# Altium PCB erb-pcb0002.PcbDoc
Units mm, origin at the board's own origin, x right, y up, seen from the top; angles counter-clockwise.
Board outline 92 x 67 mm, 4 copper layers (Top Layer, Mid-Layer 1, Mid-Layer 2, Bottom Layer); 93 components, 78 nets, 623 pads, 0 vias.
Unrouted connection lines stored in the file: 144.
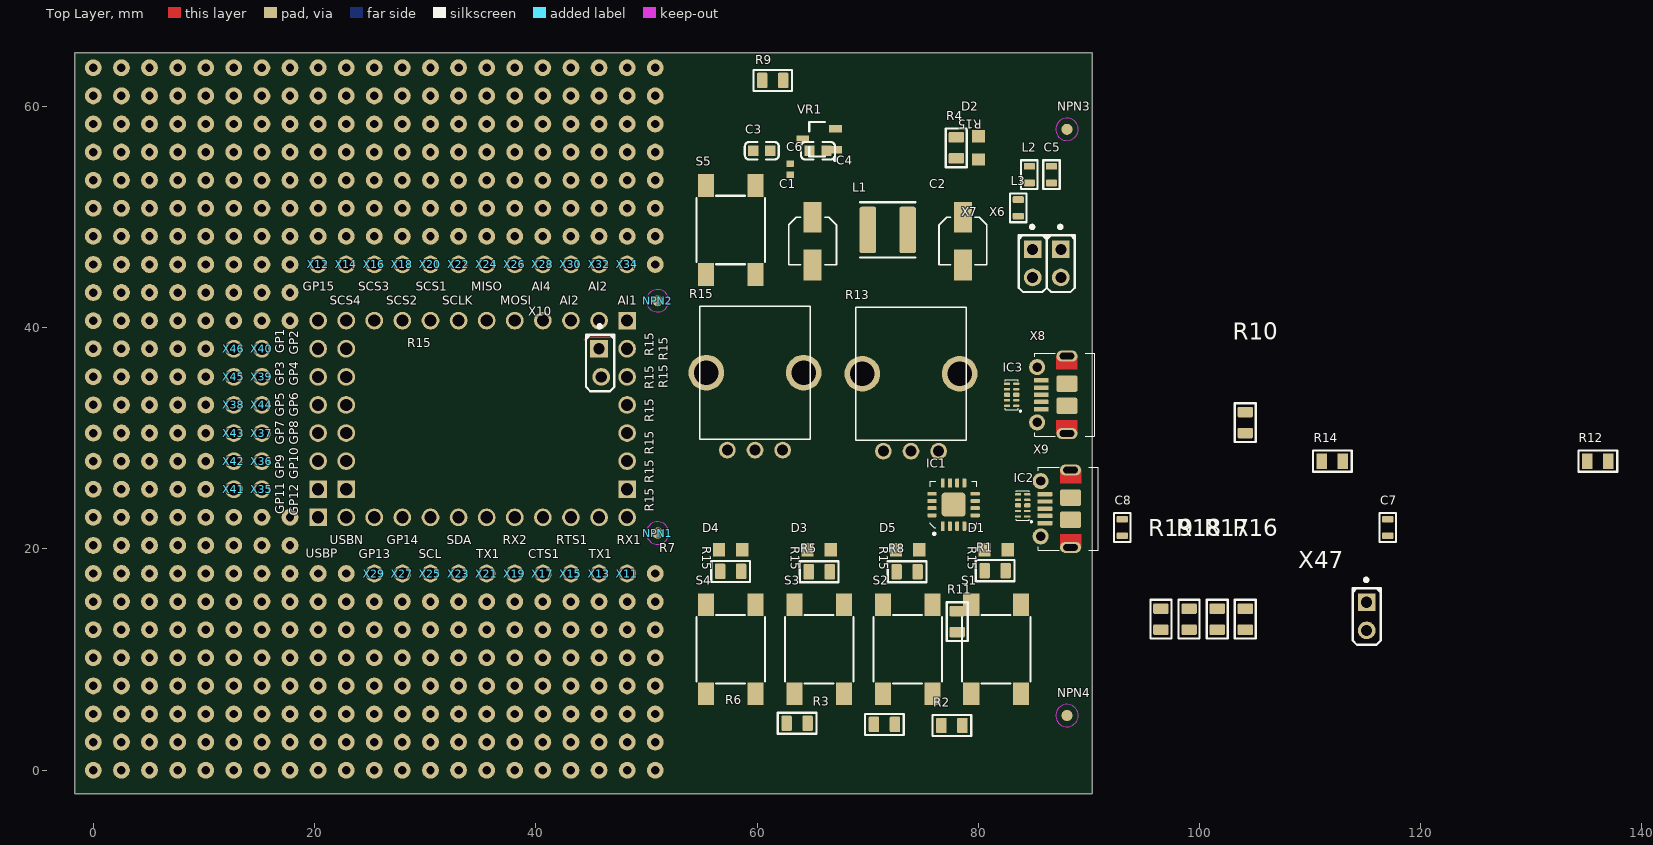
[diagram p0: Top Layer view]
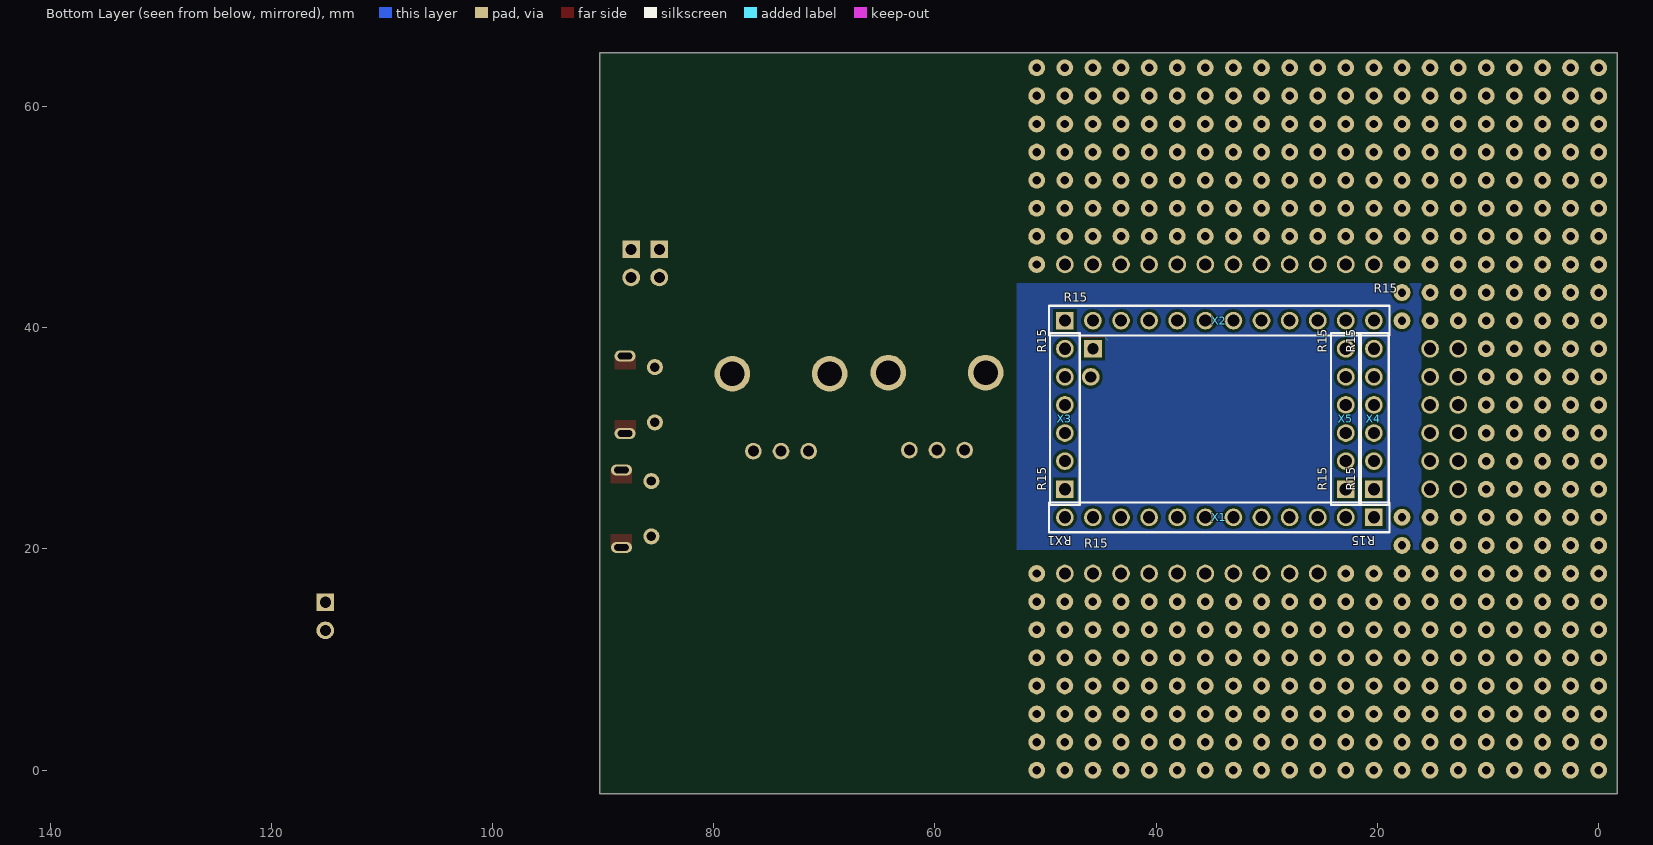
[diagram p1: Bottom Layer view, seen from below]
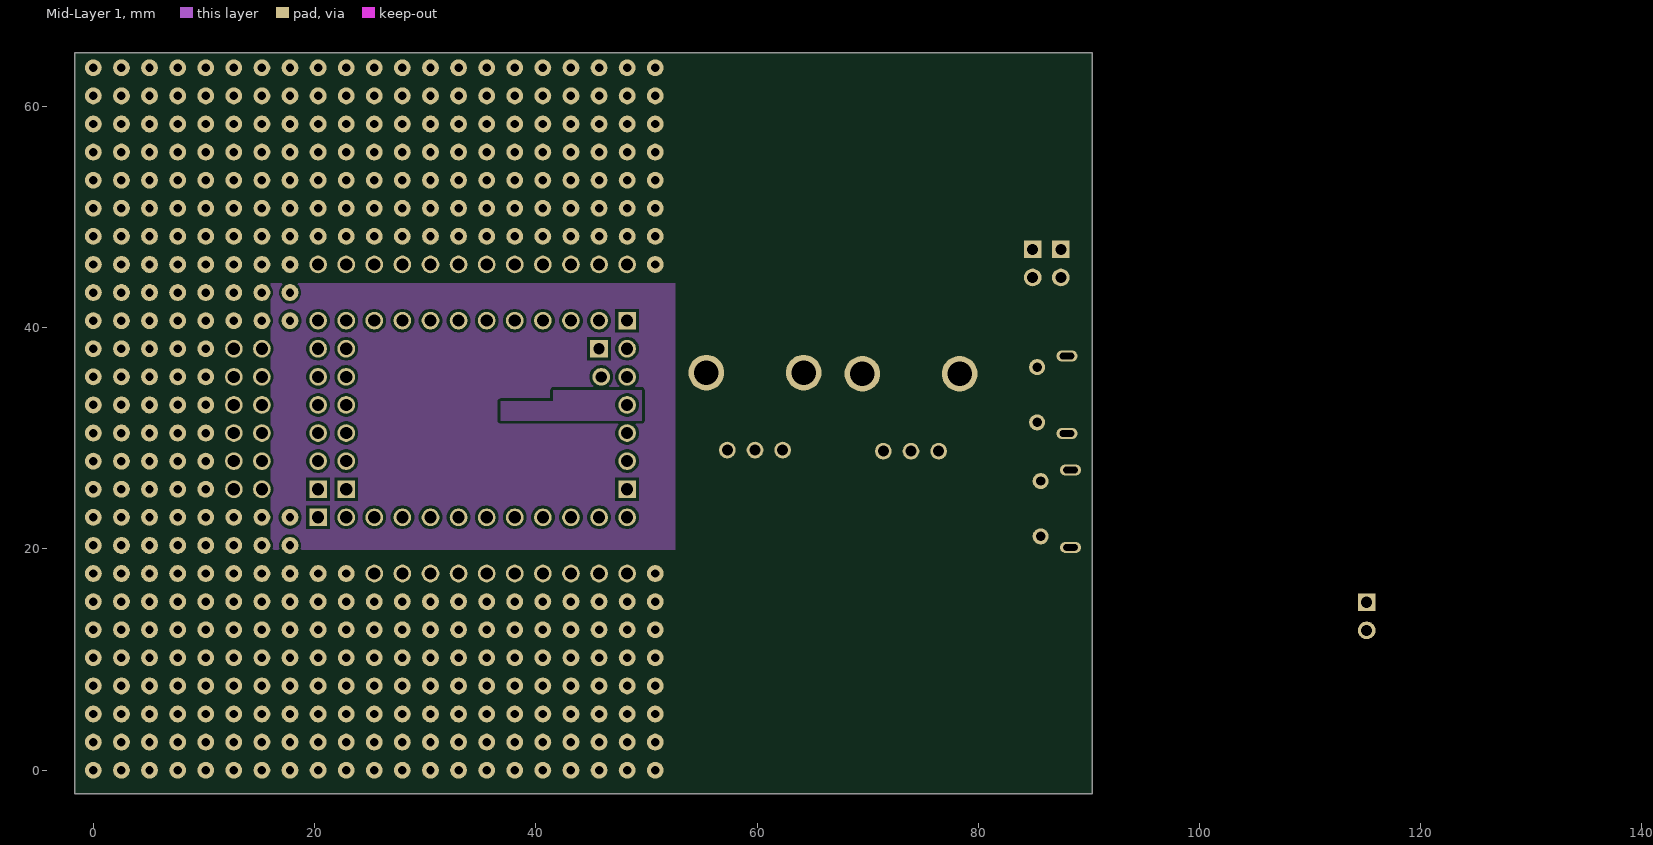
[diagram p2: Mid-Layer 1]
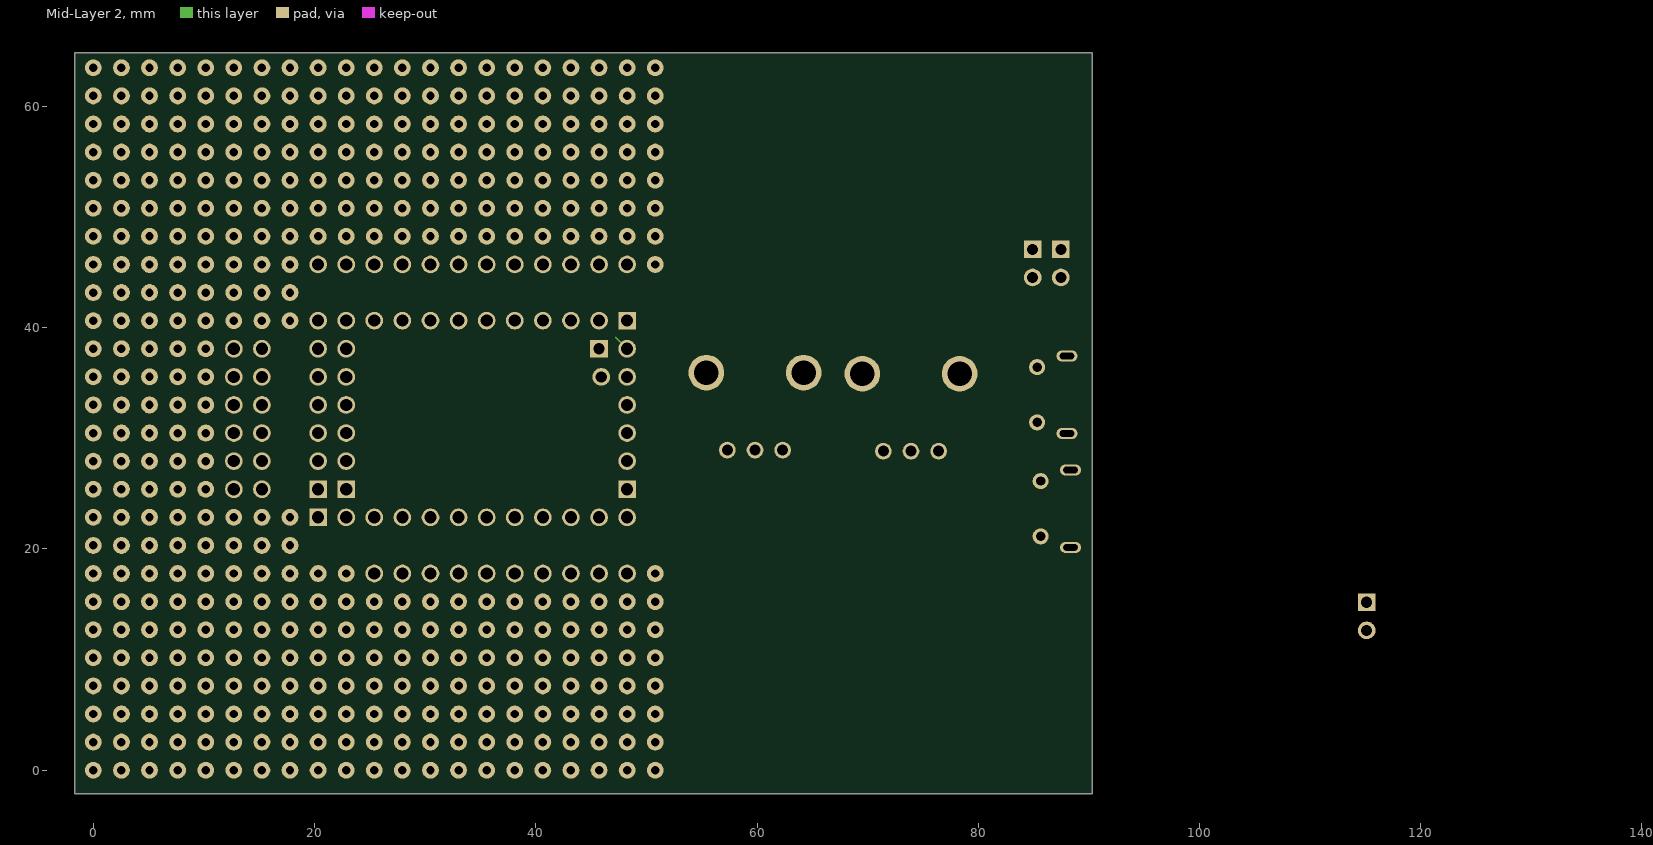
[diagram p3: Mid-Layer 2]

## Layer stack, top to bottom
Top Solder: solder mask 0.0102, Solder Resist, Dk 3.5
Top Layer: signal copper 0.0356
Dielectric 1: dielectric 0.32, FR-4, Dk 4.8
Mid-Layer 1: signal copper 0.0356
Dielectric3: dielectric 0.32, FR-4, Dk 4.8
Mid-Layer 2: signal copper 0.0356
Dielectric2: dielectric 0.32, FR-4, Dk 4.8
Bottom Layer: signal copper 0.0356
Bottom Solder: solder mask 0.0102, Solder Resist, Dk 3.5

## Board outline
-1.68,64.86 90.32,64.86 90.32,-2.14 -1.68,-2.14

## Design rules (kind name [scope] priority, off if disabled: settings)
Clearance [All] p1: gap=0.254 ignorepadtopadclearanceinfootprint=FALSE except(0: Arc-Hole Track-Hole SMDPad-Hole THPad-Hole Via-Hole Fill-Hole Poly-Hole Region-Hole Text-Hole)
DiffPairsRouting [All] p1: maxlimit=0.254 minlimit=0.254 mostfreqgap=0.254 toplayer_minwidth=0.381 toplayer_maxwidth=0.381 toplayer_prefwidth=0.381 midlayer1_minwidth=0.381 midlayer1_maxwidth=0.381 midlayer1_prefwidth=0.381 midlayer2_minwidth=0.381 midlayer2_maxwidth=0.381 midlayer2_prefwidth=0.381 bottomlayer_minwidth=0.381 bottomlayer_maxwidth=0.381 bottomlayer_prefwidth=0.381 maxuncoupledlength=12.7
PolygonConnect [All] p1: connectstyle=Relief reliefconductorwidth=0.254 reliefentries=4 polygonreliefangle="90 Angle" airgapwidth=0.254
RoutingVias [All] p1: holewidth=0.711 width=1.27 viastyle="Through Hole" minholewidth=0.711 minwidth=1.27 maxholewidth=0.711 maxwidth=1.27
SolderMaskExpansion [All] p1: expansion=0.102 istentingtop=FALSE
Width [All] p1: maxlimit=0.254 minlimit=0.254 preferedwidth=0.254
29 further rules are at their usual default settings.

## Classes and differential pairs
differential pair DBG_USB: +DBG_USB_P -DBG_USB_N

## Components (designator, comment, footprint, x,y, rotation, side; value= is the part's Value field where it differs from the comment)
C1 "22u" CAPAE4643X54M 65.02,47.84 r270 top
C2 "22u" CAPAE4643X54M 78.62,47.84 r270 top
C3 "1uF" 0603_C 60.43,56 r0 top
C4 "1uF" 0603_C 65.51,56 r0 top
C5 "100n" CAPC1608X95N 86.62,53.84 r90 top value=100nF
C6 "100nF" CAPC1005X55 63,54.34 r90 top
C7 "100n" CAPC1608X95N 117.02,21.94 r90 top value=100nF
C8 "100n" CAPC1608X95N 93.02,21.94 r90 top value=100nF
D1 "RED" WL-SMCW_0805 81.62,19.94 r180 top
D2 "RED" WL-SMCW_0805 80.02,56.265 r90 top
D3 "RED" WL-SMCW_0805 65.62,19.94 r180 top
D4 "RED" WL-SMCW_0805 57.62,19.932 r180 top
D5 "RED" WL-SMCW_0805 73.62,19.94 r180 top
IC1 "FT230X" QFN65P400X400X80-17N 77.77,24.015 r90 top
IC2 "TPD4EUSB30" "DQA R-PUSON-N10" 84.02,23.94 r90 top
IC3 "TPD4EUSB30" "DQA R-PUSON-N10" 83.02,33.94 r90 top
L1 "10uH" INDP5050X39N 71.82,48.84 r0 top
L2 "120R" INDC1608X95AN 84.62,53.84 r90 top
L3 "120R" INDC1608X95AN 83.62,50.84 r90 top
NPN1 "FID" Fiducial_1mm 51.02,21.44 r90 top
NPN2 "FID" Fiducial_1mm 51.02,42.44 r90 top
NPN3 "FID" Fiducial_1mm 88.02,57.94 r90 top
NPN4 "FID" Fiducial_1mm 88.02,4.94 r90 top
R1 "130R" RESC2012X70N#1 81.52,18.04 r180 top
R2 "100k" RESC2012X70N#1 77.62,4.04 r180 top
R3 "100k" RESC2012X70N#1 71.52,4.14 r0 top
R4 "130R" RESC2012X70N#1 78.02,56.265 r90 top
R5 "130R" RESC2012X70N#1 65.62,17.94 r180 top
R6 "100k" RESC2012X70N#1 63.62,4.24 r0 top
R7 "130R" RESC2012X70N#1 57.62,17.972 r0 top
R8 "130R" RESC2012X70N#1 73.57,17.94 r180 top
R9 "100k" RESC2012X70N#1 61.42,62.36 r0 top
R10 "100k" RESC2012X70N#1 104.14,31.43 r90 top
R11 "100k" RESC2012X70N#1 78.1,13.44 r90 top
R12 "100k" RESC2012X70N#2 136.02,27.94 r0 top
R13 "POT_50k_lin_9mm" PTV09 73.92,35.84 r0 top
R14 "100k" RESC2012X70N#2 112.02,27.94 r0 top
R15 "POT_50k_lin_9mm" PTV09 59.82,35.94 r0 top
R16 "0R" RESC2012X70N#1 104.14,13.65 r90 top
R17 "0R" RESC2012X70N#1 101.6,13.65 r90 top
R18 "0R" RESC2012X70N#1 99.06,13.65 r90 top
R19 "0R" RESC2012X70N#1 96.52,13.65 r90 top
S1 "UK-B0228-G5-160-JZ" UK-B0228-G5-160-JZ 81.62,10.94 r270 top
S2 "UK-B0228-G5-160-JZ" UK-B0228-G5-160-JZ 73.62,10.94 r90 top
S3 "UK-B0228-G5-160-JZ" UK-B0228-G5-160-JZ 65.62,10.94 r90 top
S4 "UK-B0228-G5-160-JZ" UK-B0228-G5-160-JZ 57.62,10.94 r90 top
S5 "UK-B0228-G5-160-JZ" UK-B0228-G5-160-JZ 57.62,48.84 r90 top
VR1 "XC6206P332MR" SOT-23-3L 65.62,57.04 r0 top
X1 "HDR 1x12" 61301211121 34.29,22.86 r0 bottom
X2 "HDR 1x12" 61301211121 34.29,40.64 r180 bottom
X3 "HDR 1x6" 61300611121 48.26,31.75 r90 bottom
X4 "HDR 1x6" 61300611121 20.32,31.75 r90 bottom
X5 "HDR 1x6" 61300611121 22.86,31.75 r90 bottom
X6 "HDR 1x2" CON_HEADER2.54_1x2W#1 87.464,44.546 r0 top
X7 "HDR 1x2" CON_HEADER2.54_1x2W#1 84.924,44.546 r0 top
X8 "USB Micro B_JLC" Molex_1050170001 88.02,33.94 r180 top
X9 "USB Micro B_JLC" Molex_1050170001 88.345,23.64 r180 top
X10 "HDR 1x2" CON_HEADER2.54_1x2W#2 45.82,35.56 r0 top
X11 "PAD" PAD_1.1_1.6 48.26,17.78 r0 top net-tie
X12 "PAD" PAD_1.1_1.6 20.32,45.72 r0 top net-tie
X13 "PAD" PAD_1.1_1.6 45.72,17.78 r0 top net-tie
X14 "PAD" PAD_1.1_1.6 22.86,45.72 r0 top net-tie
X15 "PAD" PAD_1.1_1.6 43.18,17.78 r0 top net-tie
X16 "PAD" PAD_1.1_1.6 25.4,45.72 r0 top net-tie
X17 "PAD" PAD_1.1_1.6 40.64,17.78 r0 top net-tie
X18 "PAD" PAD_1.1_1.6 27.94,45.72 r0 top net-tie
X19 "PAD" PAD_1.1_1.6 38.1,17.78 r0 top net-tie
X20 "PAD" PAD_1.1_1.6 30.48,45.72 r90 top net-tie
X21 "PAD" PAD_1.1_1.6 35.56,17.78 r0 top net-tie
X22 "PAD" PAD_1.1_1.6 33.02,45.72 r90 top net-tie
X23 "PAD" PAD_1.1_1.6 33.02,17.78 r90 top net-tie
X24 "PAD" PAD_1.1_1.6 35.56,45.72 r90 top net-tie
X25 "PAD" PAD_1.1_1.6 30.48,17.78 r90 top net-tie
X26 "PAD" PAD_1.1_1.6 38.1,45.72 r90 top net-tie
X27 "PAD" PAD_1.1_1.6 27.94,17.78 r90 top net-tie
X28 "PAD" PAD_1.1_1.6 40.64,45.72 r90 top net-tie
X29 "PAD" PAD_1.1_1.6 25.4,17.78 r90 top net-tie
X30 "PAD" PAD_1.1_1.6 43.18,45.72 r90 top net-tie
X32 "PAD" PAD_1.1_1.6 45.72,45.72 r90 top net-tie
X34 "PAD" PAD_1.1_1.6 48.26,45.72 r90 top net-tie
X35 "PAD" PAD_1.1_1.6 15.24,25.4 r90 top net-tie
X36 "PAD" PAD_1.1_1.6 15.24,27.94 r90 top net-tie
X37 "PAD" PAD_1.1_1.6 15.24,30.48 r90 top net-tie
X38 "PAD" PAD_1.1_1.6 12.7,33.02 r90 top net-tie
X39 "PAD" PAD_1.1_1.6 15.24,35.56 r90 top net-tie
X40 "PAD" PAD_1.1_1.6 15.24,38.1 r90 top net-tie
X41 "PAD" PAD_1.1_1.6 12.7,25.4 r0 top net-tie
X42 "PAD" PAD_1.1_1.6 12.7,27.94 r90 top net-tie
X43 "PAD" PAD_1.1_1.6 12.7,30.48 r90 top net-tie
X44 "PAD" PAD_1.1_1.6 15.24,33.02 r90 top net-tie
X45 "PAD" PAD_1.1_1.6 12.7,35.56 r90 top net-tie
X46 "PAD" PAD_1.1_1.6 12.7,38.1 r90 top net-tie
X47 "HDR 1x2" CON_HEADER2.54_1x2W#1 115.12,12.64 r0 top

## Footprints (in the part's own frame and the unit in brackets; to place one, negate y for a bottom-side part, rotate by r counter-clockwise, add the part's x,y. Pads: shape width x height; smd on the part's side, far side on the other; paste and mask are expansions set on the pad)
0603_C [mm]
  rect 0.93x0.98 smd: 1(-0.77,0) 2(0.77,0)
  silkscreen extent -1.53,-0.79 1.54,0.79, body extent -0.8,-0.4 0.8,0.4, height 0.3
61300611121 [mm] "Pin Header, pitch 2.54 mm, THT, Vertical, single row, 6p"
  rect 1.6x1.6 hole 1.1: 1(-6.35,0)
  round 1.6 hole 1.1: 2(-3.81,0) 3(-1.27,0) 4(1.27,0) 5(3.81,0) 6(6.35,0)
  silkscreen extent -7.77,-1.35 7.77,1.35, body extent -7.62,-1.27 7.62,1.27, height 8.57
61301211121 [mm] "Pin Header, pitch 2.54 mm, THT, Vertical, single row, 12p"
  rect 1.6x1.6 hole 1.1: 1(-13.97,0)
  round 1.6 hole 1.1: 2(-11.43,0) 3(-8.89,0) 4(-6.35,0) 5(-3.81,0) 6(-1.27,0) 7(1.27,0) 8(3.81,0) 9(6.35,0) 10(8.89,0) 11(11.43,0) 12(13.97,0)
  silkscreen extent -15.39,-1.35 15.39,1.35, body extent -15.24,-1.27 15.24,1.27, height 8.57
CAPAE4643X54M [mm] "Aluminum Electrolytic Capacitor, Body 4,30x4,30x5,40mm, IPC Low Density"
  rect 2.8x1.6 smd: 1(-2.15,0) 2(2.15,0)
  silkscreen extent -2.15,-2.15 2.15,2.15, body extent -2.3,-2.15 2.3,2.15, height 5.4
CAPC1005X55 [mm] "Chip Capacitor, 2-Leads, Body 1,0x0,5mm, imperial 0402"
  rrect25% 0.6x0.7 smd: 1(-0.5,0) 2(0.5,0)
  body extent -0.5,-0.3 0.5,0.3, height 0.55
CAPC1608X95N [mm] "Chip Capacitor, 2-Leads, Body 1,6x0,8mm, imperial 0603"
  rrect25% 0.6x1 smd: 1(-0.75,0) 2(0.75,0)
  silkscreen extent -1.3,-0.75 1.3,0.75, body extent -0.8,-0.4 0.8,0.4, height 0.3
CON_HEADER2.54_1x2W#1 [mm]
  rect 1.6x1.6 hole 1: 1(0,2.54)
  round 1.6 hole 1: 2(0,0)
  silkscreen extent -1.27,-1.31 1.27,4.71, body extent -1.27,-1.27 1.27,3.81, height 9.51
CON_HEADER2.54_1x2W#2 [mm]
  rect 1.6x1.6 hole 1: 1(-0.1,2.54)
  round 1.6 hole 1: 2(0.1,0)
  silkscreen extent -1.27,-1.31 1.27,4.71, body extent -1.27,-1.27 1.27,3.81, height 9.51
"DQA R-PUSON-N10" [mm]
  rrect50% 0.2x0.56 smd mask+0.05: 1(-1,-0.415) 2(-0.5,-0.415) 4(0.5,-0.415) 5(1,-0.415) 6(1,0.415) 7(0.5,0.415) 9(-0.5,0.415) 10(-1,0.415)
  rrect50% 0.4x0.56 smd mask+0.05: 3(0,-0.415) 8(0,0.415)
  silkscreen extent -1.5,-0.81 1.34,0.59, body extent -1.25,-0.5 1.25,0.5, height 0.55
Fiducial_1mm [mm]
  round 1 smd mask+0.5: 0(0,0)
  Top Layer keep-out circle w0.01: c0,0 r1.016
INDC1608X95AN [mm] "Chip Inductor, 2-Leads, Body 1,6x0,8mm, imperial 0603"
  rrect25% 0.6x1 smd: 1(-0.75,0) 2(0.75,0)
  silkscreen extent -1.3,-0.75 1.3,0.75, body extent -0.8,-0.47 0.8,0.48, height 0.8
INDP5050X39N [mm] "Precision Wire Wound Inductor, 2-Leads, Body 4,95x4,95mm, IPC Medium Density"
  rrect25% 1.5x4.2 smd: 1(-1.8,0) " "(1.8,0)
  silkscreen extent -2.5,-2.5 2.5,2.5, body extent -2.47,-2.47 2.48,2.48, height 3.9
Molex_1050170001 [mm] "USB 2.0 FEMALE R/A A TYPE"
  rrect25% 1.35x0.4 smd mask+0.05: 1(2.325,1.3) 2(2.325,0.65) 3(2.325,0) 4(2.325,-0.65) 5(2.325,-1.3)
  oval 1.9x1 hole 0.6 slot 1.3 at 0 deg: SH(0,3.5) SH(0,-3.5)
  rrect25% 1.9x1.5 smd: SH(0,1) SH(0,-1)
  round 1.45 hole 0.85: SH(2.7,2.5) SH(2.7,-2.5)
  Top Layer region: -0.95,3.5 -0.95,2.3 0.95,2.3 0.95,3.5
  Top Layer region: 0.95,-3.5 0.95,-2.3 -0.95,-2.3 -0.95,-3.5
  silkscreen extent -2.5,-3.75 2.9,3.75, body extent -2.5,-4.1 2.9,4.1, height 2.68
PAD_1.1_1.6 [mm]
  round 1.6 hole 1.1: 1(0,0)
PTV09 [mm]
  round 1.508 hole 1: 1(-2.5,-7) 2(0,-7) 3(2.5,-7)
  round 3.216 hole 2.2: NC1(-4.4,0) NC2(4.4,0)
  silkscreen extent -5,-6 5,6, body extent -5.89,-6.8 5.5,5.8, height 25.5
QFN65P400X400X80-17N [mm] "FT230X USB TO BASIC UART IC"
  rect 0.85x0.35 smd: 1(-1.95,0.975)
  rrect50% 0.85x0.35 smd: 2(-1.95,0.325) 3(-1.95,-0.325) 4(-1.95,-0.975) 9(1.95,-0.975) 10(1.95,-0.325) 11(1.95,0.325) 12(1.95,0.975)
  rrect50% 0.35x0.85 smd: 5(-0.975,-1.95) 6(-0.325,-1.95) 7(0.325,-1.95) 8(0.975,-1.95) 13(0.975,1.95) 14(0.325,1.95) 15(-0.325,1.95) 16(-0.975,1.95)
  rrect25% 2.15x2.15 smd: 17(0,0)
  silkscreen extent -2.75,-2.1 2.1,2.1, body extent -2.05,-2.05 2.05,2.05, height 0.8
RESC2012X70N#1 [mm] "Chip Resistor, 2-Leads, Body 2,0x1,25mm, imperial 0805"
  rrect25% 0.95x1.4 smd: 1(-0.95,0) 2(0.95,0)
  silkscreen extent -1.75,-0.95 1.75,0.95, body extent -1,-0.6 1,0.6, height 0.7
RESC2012X70N#2 [mm] "Chip Resistor, 2-Leads, Body 2,0x1,25mm, imperial 0805"
  rect 0.95x1.4 smd: 1(-0.95,0) 2(0.95,0)
  silkscreen extent -1.75,-0.95 1.75,0.95, body extent -1,-0.6 1,0.6, height 0.7
SOT-23-3L [mm] "http://www.aosmd.com/res/packaging_information/SOT-23-3L.pdf"
  rect 1.15x0.65 smd: 1(1.475,-0.95) 2(1.475,0.95) 3(-1.475,0)
  silkscreen extent -0.9,-1.95 1.6,1.55, body extent -0.9,-1.55 0.9,1.55, height 1.25
UK-B0228-G5-160-JZ [mm] "SMD Tact Switch, body 6x6mm"
  rect 2.05x1.45 smd: 1(-4.025,2.25) 2(4.025,2.25) 3(-4.025,-2.25) 4(4.025,-2.25)
  silkscreen extent -3.1,-3.1 3.1,3.1, body extent -4.5,-3.1 4.5,3.1, height 7
WL-SMCW_0805 [mm] "SMD Mono-color Chip LED, body 2.0x1.25mm"
  rect 1.1x1.2 smd: A(1.05,0) K(-1.05,0)
  body extent -1,-0.63 1,0.62, height 0.7

## Part data
C1 C2: library part CAP_22u, "Aluminium Electrolytic Capacitors - SMD 22UF 16V HA SMD", Manufacturer=Panasonic, Manufacturer Part Number=EEE-HAC220WAR, Tolerance=20%, Voltage Rating=16V, Alternatives allowed=NO
C3 C4: library part "0603 1uF (105) 10% 50V", "Chip capacitors", Manufacturer="Samsung Electro-Mechanics", Package=0603, PartNumber=CL10A105KB8NNNC, SuppliersPartNumber=C15849, Tolerance=10%, Voltage=50V, Capacitance=1uF, ComponentLink1Description="Supplier link", ComponentLink1URL=http://www.szlcsc.com/product/details_16531.html, Supplier=LC
C5 C7 C8: library part 100n_50V, "100n_50V", Manufacturer=AVX, Manufacturer Part Number=06031C104KAT2A, Tolerance=+-10%, Voltage Rating=100V, Alternatives allowed=YES, Notes="X7R, 0603"
C6: library part CAP_100nF_0402, "X7R 100nF ±10% 16V 0402 Multilayer Ceramic Capacitors MLCC - SMD/SMT ROHS", JLC=C1525, Manufacturer="Samsung Electro-Mechanics", Manufacturer Part Number=CL05B104KO5NNNC, Tolerance=10%, Voltage Rating=16VDC, Alternatives allowed=yes
D1 D2 D3 D4 D5: library part LED_0805_RED_AK, "Standard LEDs - SMD WL-SMCW SMDMono TpVw Waterclr 0805 Red", JLC=C84256, Manufacturer="Wurth Elektronik", Manufacturer Part Number=150080RS75000, Voltage Rating=2.0, Alternatives allowed=YES
IC1: library part IC_FT230X, "USB TO BASIC UART IC", Manufacturer=FTDI, Manufacturer Part Number=FT230XQ-R, Supplier Part Number 1=895-FT230XQ-R, Alternatives allowed=NO, Supplier 1=Mouser
IC2 IC3: library part TPD4EUSB30DQAR, "2-, 4-Channel ESD Protection for Super-Speed USB 3.0 Interface", Manufacturer="Texas Instruments", Alternatives allowed=NO, Manufacturer Part Number=TPD4EUSB30DQAR
L1: library part IND_10uH_2.2A, "Fixed Inductors 10uH 2.2A", JLC=N/A, Manufacturer=Bourns, Manufacturer Part Number=SRN5040TA-100M, Tolerance=10%, Voltage Rating=50V, Alternatives allowed=yes
L2 L3: library part FB_120R_0603, "Chip Bead Inductors for Power Lines", Manufacturer="Taiyo Yuden", Manufacturer Part Number=FBMH1608HL121-T, Alternatives allowed=YES, Notes="0603, 1,2A"
NPN1 NPN2 NPN3 NPN4: library part Fiducial_1mm
R1 R4 R5 R7 R8: library part RES_130R_0805, "Dickfilmwiderstände - SMD 1/8watt 130ohms 1% 100ppm", JLC=C17437, Manufacturer="Vishay / Dale", Manufacturer Part Number=CRCW0805130RFKEA, Tolerance=1%, Voltage Rating=150V, Alternatives allowed=YES
R2 R3 R6 R9 R10 R11 R12 R14: library part RES_100k_0805, "Thick Film Resistors - SMD 1/8watt 100Kohms 1% 100ppm", JLC=C17407, Manufacturer="Vishay / Dale", Manufacturer Part Number=CRCW0805100KFKEA, Tolerance=1%, Voltage Rating=150V, Alternatives allowed=YES
R13 R15: "Potentiometers PANEL CONTROL - 9MM-ST-CA 50 kohms 30 mm", Manufacturer=Bourns, Manufacturer Part Number=PTV09A-4030S-A503, Tolerance=20%
R16 R17 R18 R19: library part RES_0R_0805, "Thick Film Resistors - SMD 1/8watt ZEROohm Jumper", JLC=C17477, Manufacturer=Vishay, Manufacturer Part Number=CRCW08050000Z0EA, Tolerance=1%, Voltage Rating=150V, Alternatives allowed=YES
S1 S2 S3 S4 S5: library part SW_UK-B0228-G5-160-JZ, "No NO Gull Wing 50mA 6mm 100MΩ 100000 12V 160gf@±50gf -20℃~+70℃ 6mm 5mm Black Round Button Brick nogging SPST SMD Tactile Switches ROHS", JLC=C620316, Manufacturer=USAKRO, Manufacturer Part Number=UK-B0228-G5-160-JZ
VR1: library part "SOT-23 XC6206P332MR", "低压差线性稳压(LDO)", Package=SOT-23, SuppliersPartNumber=C5446, ComponentLink1Description=供应商链接, ComponentLink1URL=http://www.szlcsc.com/product/details_5896.html, Supplier=LC
X1 X2: library part CON_HEADER_1X12, "Board-to-Board-Steckverbinder, 2.54 mm, 12 Kontakt(e), Stiftleiste 1-Reihig", Manufacturer=WE, Manufacturer Part Number=61301211121, Alternatives allowed=YES
X3 X4 X5: library part CON_HEADER_1X6, "Board-to-Board-Steckverbinder, 2.54 mm, 6 Kontakt(e), Stiftleiste 1-Reihig", Manufacturer=WE, Manufacturer Part Number=61300611121, Alternatives allowed=YES
X6 X7 X10 X47: library part CON_HEADER_1X2, "Board-to-Board-Steckverbinder, 2.54 mm, 2 Kontakt(e), Stiftleiste 1-Reihig", Lumira Part Number=S-QMS-SPEC-32507, Manufacturer=Samtec, Manufacturer Part Number=TSW-102-07-T-S, Alternatives allowed=YES
X8 X9: "USB Micro B", JLC=C505111, Manufacturer=Molex, Manufacturer Part Number=1050170001, Alternatives allowed=NO
X11 X12 X13 X14 X15 X16 X17 X18 X19 X20 X21 X22 X23 X24 X25 X26 X27 X28 X29 X30 X32 X34 X35 X36 X37 X38 X39 X40 X41 X42 X43 X44 X45 X46: library part PAD_2.54

## Free pads (board coordinates)
  round 1.524 hole 0.762: 2(0,0) 2(0,2.54) 2(0,5.08) 2(0,7.62) 2(0,10.16) 2(0,12.7) 2(0,15.24) 2(0,17.78) 2(0,20.32) 2(0,22.86) 2(0,25.4) 2(0,27.94) 2(0,30.48) 2(0,33.02) 2(0,35.56) 2(0,38.1) 2(0,40.64) 2(0,43.18) 2(0,45.72) 2(0,48.26) 2(0,50.8) 2(0,53.34) 2(0,55.88) 2(0,58.42) 2(0,60.96) 2(0,63.5) 2(2.54,0) 2(2.54,2.54) 2(2.54,5.08) 2(2.54,7.62) 2(2.54,10.16) 2(2.54,12.7) 2(2.54,15.24) 2(2.54,17.78) 2(2.54,20.32) 2(2.54,22.86) 2(2.54,25.4) 2(2.54,27.94) 2(2.54,30.48) 2(2.54,33.02) 2(2.54,35.56) 2(2.54,38.1) 2(2.54,40.64) 2(2.54,43.18) 2(2.54,45.72) 2(2.54,48.26) 2(2.54,50.8) 2(2.54,53.34) 2(2.54,55.88) 2(2.54,58.42) 2(2.54,60.96) 2(2.54,63.5) 2(5.08,0) 2(5.08,2.54) 2(5.08,5.08) 2(5.08,7.62) 2(5.08,10.16) 2(5.08,12.7) 2(5.08,15.24) 2(5.08,17.78) 2(5.08,20.32) 2(5.08,22.86) 2(5.08,25.4) 2(5.08,27.94) 2(5.08,30.48) 2(5.08,33.02) 2(5.08,35.56) 2(5.08,38.1) 2(5.08,40.64) 2(5.08,43.18) 2(5.08,45.72) 2(5.08,48.26) 2(5.08,50.8) 2(5.08,53.34) 2(5.08,55.88) 2(5.08,58.42) 2(5.08,60.96) 2(5.08,63.5) 2(7.62,0) 2(7.62,2.54) 2(7.62,5.08) 2(7.62,7.62) 2(7.62,10.16) 2(7.62,12.7) 2(7.62,15.24) 2(7.62,17.78) 2(7.62,20.32) 2(7.62,22.86) 2(7.62,25.4) 2(7.62,27.94) 2(7.62,30.48) 2(7.62,33.02) 2(7.62,35.56) 2(7.62,38.1) 2(7.62,40.64) 2(7.62,43.18) 2(7.62,45.72) 2(7.62,48.26) 2(7.62,50.8) 2(7.62,53.34) 2(7.62,55.88) 2(7.62,58.42) 2(7.62,60.96) 2(7.62,63.5) 2(10.16,0) 2(10.16,2.54) 2(10.16,5.08) 2(10.16,7.62) 2(10.16,10.16) 2(10.16,12.7) 2(10.16,15.24) 2(10.16,17.78) 2(10.16,20.32) 2(10.16,22.86) 2(10.16,25.4) 2(10.16,27.94) 2(10.16,30.48) 2(10.16,33.02) 2(10.16,35.56) 2(10.16,38.1) 2(10.16,40.64) 2(10.16,43.18) 2(10.16,45.72) 2(10.16,48.26) 2(10.16,50.8) 2(10.16,53.34) 2(10.16,55.88) 2(10.16,58.42) 2(10.16,60.96) 2(10.16,63.5) 2(12.7,0) 2(12.7,2.54) 2(12.7,5.08) 2(12.7,7.62) 2(12.7,10.16) 2(12.7,12.7) 2(12.7,15.24) 2(12.7,17.78) 2(12.7,20.32) 2(12.7,22.86) 2(12.7,40.64) 2(12.7,43.18) 2(12.7,45.72) 2(12.7,48.26) 2(12.7,50.8) 2(12.7,53.34) 2(12.7,55.88) 2(12.7,58.42) 2(12.7,60.96) 2(12.7,63.5) 2(15.24,0) 2(15.24,2.54) 2(15.24,5.08) 2(15.24,7.62) 2(15.24,10.16) 2(15.24,12.7) 2(15.24,15.24) 2(15.24,17.78) 2(15.24,20.32) 2(15.24,22.86) 2(15.24,40.64) 2(15.24,43.18) 2(15.24,43.18) 2(15.24,45.72) 2(15.24,48.26) 2(15.24,50.8) 2(15.24,53.34) 2(15.24,55.88) 2(15.24,58.42) 2(15.24,60.96) 2(15.24,63.5) 2(17.78,0) 2(17.78,2.54) 2(17.78,5.08) 2(17.78,7.62) 2(17.78,10.16) 2(17.78,12.7) 2(17.78,15.24) 2(17.78,17.78) 2(17.78,20.32) 2(17.78,22.86) 2(17.78,40.64) 2(17.78,43.18) 2(17.78,45.72) 2(17.78,48.26) 2(17.78,50.8) 2(17.78,53.34) 2(17.78,55.88) 2(17.78,58.42) 2(17.78,60.96) 2(17.78,63.5) 2(20.32,0) 2(20.32,2.54) 2(20.32,5.08) 2(20.32,7.62) 2(20.32,10.16) 2(20.32,12.7) 2(20.32,15.24) 2(20.32,17.78) 2(20.32,48.26) 2(20.32,50.8) 2(20.32,53.34) 2(20.32,55.88) 2(20.32,58.42) 2(20.32,60.96) 2(20.32,63.5) 2(22.86,0) 2(22.86,2.54) 2(22.86,5.08) 2(22.86,7.62) 2(22.86,10.16) 2(22.86,12.7) 2(22.86,15.24) 2(22.86,17.78) 2(22.86,48.26) 2(22.86,50.8) 2(22.86,53.34) 2(22.86,55.88) 2(22.86,58.42) 2(22.86,60.96) 2(22.86,63.5) 2(25.4,0) 2(25.4,2.54) 2(25.4,5.08) 2(25.4,7.62) 2(25.4,10.16) 2(25.4,12.7) 2(25.4,15.24) 2(25.4,48.26) 2(25.4,50.8) 2(25.4,53.34) 2(25.4,55.88) 2(25.4,58.42) 2(25.4,60.96) 2(25.4,63.5) 2(27.94,0) 2(27.94,2.54) 2(27.94,5.08) 2(27.94,7.62) 2(27.94,10.16) 2(27.94,12.7) 2(27.94,15.24) 2(27.94,48.26) 2(27.94,50.8) 2(27.94,53.34) 2(27.94,55.88) 2(27.94,58.42) 2(27.94,60.96) 2(27.94,63.5) 2(30.48,0) 2(30.48,2.54) 2(30.48,5.08) 2(30.48,7.62) 2(30.48,10.16) 2(30.48,12.7) 2(30.48,15.24) 2(30.48,48.26) 2(30.48,50.8) 2(30.48,53.34) 2(30.48,55.88) 2(30.48,58.42) 2(30.48,60.96) 2(30.48,63.5) 2(33.02,0) 2(33.02,2.54) 2(33.02,5.08) 2(33.02,7.62) 2(33.02,10.16) 2(33.02,12.7) 2(33.02,15.24) 2(33.02,48.26) 2(33.02,50.8) 2(33.02,53.34) 2(33.02,55.88) 2(33.02,58.42) 2(33.02,60.96) 2(33.02,63.5) 2(35.56,0) 2(35.56,2.54) 2(35.56,5.08) 2(35.56,7.62) 2(35.56,10.16) 2(35.56,12.7) 2(35.56,15.24) 2(35.56,48.26) 2(35.56,50.8) 2(35.56,53.34) 2(35.56,55.88) 2(35.56,58.42) 2(35.56,60.96) 2(35.56,63.5) 2(38.1,0) 2(38.1,2.54) 2(38.1,5.08) 2(38.1,7.62) 2(38.1,10.16) 2(38.1,12.7) 2(38.1,15.24) 2(38.1,48.26) 2(38.1,50.8) 2(38.1,53.34) 2(38.1,55.88) 2(38.1,58.42) 2(38.1,60.96) 2(38.1,63.5) 2(40.64,0) 2(40.64,2.54) 2(40.64,5.08) 2(40.64,7.62) 2(40.64,10.16) 2(40.64,12.7) 2(40.64,15.24) 2(40.64,48.26) 2(40.64,50.8) 2(40.64,53.34) 2(40.64,55.88) 2(40.64,58.42) 2(40.64,60.96) 2(40.64,63.5) 2(43.18,0) 2(43.18,2.54) 2(43.18,5.08) 2(43.18,7.62) 2(43.18,10.16) 2(43.18,12.7) 2(43.18,15.24) 2(43.18,48.26) 2(43.18,50.8) 2(43.18,53.34) 2(43.18,55.88) 2(43.18,58.42) 2(43.18,60.96) 2(43.18,63.5) 2(45.72,0) 2(45.72,2.54) 2(45.72,5.08) 2(45.72,7.62) 2(45.72,10.16) 2(45.72,12.7) 2(45.72,15.24) 2(45.72,48.26) 2(45.72,50.8) 2(45.72,53.34) 2(45.72,55.88) 2(45.72,58.42) 2(45.72,60.96) 2(45.72,63.5) 2(48.26,0) 2(48.26,2.54) 2(48.26,5.08) 2(48.26,7.62) 2(48.26,10.16) 2(48.26,12.7) 2(48.26,15.24) 2(48.26,48.26) 2(48.26,50.8) 2(48.26,53.34) 2(48.26,55.88) 2(48.26,58.42) 2(48.26,60.96) 2(48.26,63.5) 2(50.8,0) 2(50.8,2.54) 2(50.8,5.08) 2(50.8,7.62) 2(50.8,10.16) 2(50.8,12.7) 2(50.8,15.24) 2(50.8,17.78) 2(50.8,45.72) 2(50.8,48.26) 2(50.8,50.8) 2(50.8,53.34) 2(50.8,55.88) 2(50.8,58.42) 2(50.8,60.96) 2(50.8,63.5)

## Nets (pads, with @x,y where several pads share a name; then routed paths per layer and width w, separated by ;. In a path a pad name is that pad's centre, name@x,y a point inside that pad or via, vN(x,y) a via of type N, cw(c..) or ccw(c..) an arc to the next point about the centre after c; other vN are vias at no path point)
3V3A: C2.1 R13.3 R15.3 X3.4 X10.2
5V0: C3.2 C6.2 IC1.10 L2.1 VR1.3 X47.1
Analog_In_1: X2.1 X34.1
Analog_In_2: X2.2 X32.1
Analog_In_3: X2.3 X30.1
Analog_In_4: X2.4 X28.1
Boot_0: X3.6 | length 1.4
  Mid-Layer 2 w0.15: 47.235,39.125 X3.6
DBG_3V3_OUT: IC1.8 IC1.9
DBG_USB_N: IC1.7 IC2.1 IC2.10 X9.2
DBG_USB_P: IC1.6 IC2.2 IC2.9 X9.3
GND: C1.2 C2.2 C3.1 C4.1 C5.1 C6.1 C7.2 C8.2 D1.K D2.K D3.K D4.K D5.K IC1.3 IC1.13 IC1.17 IC2.3 IC2.8 R2.2 R3.2 R6.2 R9.2 R10.2 R13.1 R15.1 VR1.1 X3.1 X3.3 X6.2 X8.4 X8.5 X8.SH X9.4 X9.5 X9.SH
GPIO1: X4.6 X46.1
GPIO2: X5.6 X40.1
GPIO3: X4.5 X45.1
GPIO4: X5.5 X39.1
GPIO5: X4.4 X44.1
GPIO6: X5.4 X38.1
GPIO7: X4.3 X43.1
GPIO8: X5.3 X37.1
GPIO9: X4.2 X42.1
GPIO10: X5.2 X36.1
GPIO11: X4.1 X41.1
GPIO12: X5.1 X35.1
GPIO13: X1.3 X29.1
GPIO14: X1.4 X27.1
GPIO15: X2.12 X12.1
I2C_SCL: X1.5 X25.1
I2C_SDA: X1.6 X23.1
LED_1: R4.1
LED_2: R5.1
LED_3: R7.1
LED_4: R8.1
NetC7_1: C7.1 R12.2 R13.2
NetC8_1: C8.1 R14.2 R15.2
NetD1_A: D1.A R1.2
NetD2_A: D2.A R4.2
NetD3_A: D3.A R5.2
NetD4_A: D4.A R7.2
NetD5_A: D5.A R8.2
NetIC1_2: IC1.2 R17.2
NetIC1_4: IC1.4 R19.2
NetIC1_15: IC1.15 R16.2
NetIC1_16: IC1.16 R18.2
NetL2_2: L2.2 X9.1
NetL3_1: L3.1 X47.2
NetL3_2: L3.2 X8.1
NetR2_1: R2.1 S1.4
NetR3_1: R3.1 S2.3 S2.4
NetR6_1: R6.1 S3.3 S3.4
NetR9_1: R9.1 S4.3 S4.4
NetR10_1: R10.1 S5.3 S5.4
NetR11_1: R11.1 X6.1
PA0: R12.1
PA1: R14.1
Reset: C1.1 C4.2 C5.2 IC1.1 L1.1 R1.1 R11.2 S1.2 S2.1 S2.2 S3.1 S3.2 S4.1 S4.2 S5.1 S5.2 VR1.2 X3.2 X3.5 X10.1
SPI_CLK: X2.7 X22.1
SPI_CS1: X2.8 X20.1
SPI_CS2: X2.9 X18.1
SPI_CS3: X2.10 X16.1
SPI_CS4: X2.11 X14.1
SPI_MISO: X2.6 X24.1
SPI_MOSI: X2.5 X26.1
SWCLK: X7.1
SWDIO: X7.2
"UART0 CTS": R18.1
"UART0 RTS": R19.1
"UART0 RX": R17.1
"UART0 TX": R16.1
UART1_CTS: X1.9 X17.1
UART1_RTS: X1.10 X15.1
UART1_RX: X1.12 X11.1
UART1_TX: X1.11 X13.1
UART2_RX: X1.8 X19.1
UART2_TX: X1.7 X21.1
USB_0_DN: IC3.1 IC3.10 X8.2
USB_0_DP: IC3.2 IC3.9 X8.3
USB_DN: X1.2
USB_DP: X1.1 | length 2.4
  Top Layer w0.15: 44.404,38.9 44.629,39.125 46.745,39.125
pads on no net: "L1. " IC1.5 IC1.11 IC1.12 IC1.14 IC2.4 IC2.5 IC2.6 IC2.7 IC3.3 IC3.4 IC3.5 IC3.6 IC3.7 IC3.8 NPN1.0 NPN2.0 NPN3.0 NPN4.0 R13.NC1 R13.NC2 R15.NC1 R15.NC2 S1.1 S1.3

## Polygon pours and split planes (outlines as drawn)
no net on Mid-Layer 1 "NONET_L02_P005" (solid, pour order 5): 52.595,44.035 52.595,19.94 16.02,19.94 16.02,44.035
no net on Mid-Layer 1 "NONET_L02_P004" (solid, pour order 4): 41.57,34.36 41.57,33.36 36.82,33.36 36.82,31.61 49.57,31.61 49.57,34.36
no net on Bottom Layer "NONET_L04_P003" (solid, pour order 3): 16.02,44.035 52.595,44.035 52.595,19.94 16.02,19.94

## Silkscreen, mask and mechanical layers (free items; w line width, h text height)
Top Overlay:
  text "GP15" at 18.92,43.33 h0.8
  text "SCS3" at 23.934,43.33 h0.8
  text "SCS1" at 29.147,43.33 h0.8
  text "MISO" at 34.16,43.33 h0.8
  text "AI4" at 39.64,43.33 h0.8
  text "AI2" at 44.72,43.33 h0.8
  text "SCS4" at 21.394,42.06 h0.8
  text "SCS2" at 26.474,42.06 h0.8
  text "SCLK" at 31.554,42.06 h0.8
  text "MOSI" at 36.767,42.06 h0.8
  text "AI2" at 42.18,42.06 h0.8
  text "AI1" at 47.394,42.06 h0.8
  text "R15" at 28.395,38.25 h0.8
  text "GP1" at 17.249,37.675 h0.8 r90
  text "GP2" at 18.519,37.542 h0.8 r90
  text "R15" at 50.645,37.4 h0.8 r90
  text "R15" at 51.945,37.015 h0.8 r90
  text "GP3" at 17.249,34.748 h0.8 r90
  text "GP4" at 18.519,34.748 h0.8 r90
  text "R15" at 51.945,34.515 h0.8 r90
  text "R15" at 50.645,34.426 h0.8 r90
  text "GP5" at 17.249,31.954 h0.8 r90
  text "GP6" at 18.519,31.954 h0.8 r90
  text "R15" at 50.645,31.47 h0.8 r90
  text "GP7" at 17.249,29.414 h0.8 r90
  text "GP8" at 18.519,29.414 h0.8 r90
  text "R15" at 50.645,28.53 h0.8 r90
  text "GP9" at 17.249,26.366 h0.8 r90
  text "GP10" at 18.519,26.286 h0.8 r90
  text "R15" at 50.645,25.96 h0.8 r90
  text "R15" at 50.645,23.36 h0.8 r90
  text "GP11" at 17.249,23.118 h0.8 r90
  text "GP12" at 18.519,22.984 h0.8 r90
  text "USBN" at 21.394,20.41 h0.8
  text "GP14" at 26.54,20.41 h0.8
  text "SDA" at 31.954,20.41 h0.8
  text "RX2" at 37.034,20.41 h0.8
  text "RTS1" at 41.847,20.41 h0.8
  text "RX1" at 47.327,20.41 h0.8
  text "USBP" at 19.2,19.2 h0.8
  text "GP13" at 24,19.14 h0.8
  text "SCL" at 29.414,19.14 h0.8
  text "TX1" at 34.627,19.14 h0.8
  text "CTS1" at 39.307,19.14 h0.8
  text "TX1" at 44.787,19.14 h0.8
Bottom Overlay:
  text "R15" at 46.516,20.09 h0.8
Mechanical 1:
  lines w0.05: 52.595,44.035 52.595,44.035 ; 52.595,44.035 52.595,19.94 52.595,44.035 ; 52.595,44.035 52.595,44.035
  lines w0.254: -1.68,-2.14 90.32,-2.14 90.32,64.86 ; -1.68,-2.14 -1.68,-2.14 ; -1.68,-2.14 -1.68,64.86 ; -1.68,64.86 -1.68,64.86 ; -1.68,64.86 90.32,64.86 ; 90.32,64.86 90.32,64.86
Mechanical 2:
  lines w0.05: 52.595,44.035 52.595,19.94 ; 52.595,19.94 52.595,19.94 ; 52.595,19.94 52.595,19.94 ; 52.595,19.94 52.595,19.94
  lines w0.1: 52.595,44.035 52.595,44.035

## Text inside footprints (layer, text, board x,y; h text height)
C5: Mechanical 21 "R15" at 87.259,47.365 h0.8 r90
C6: Mechanical 21 "R15" at 63.639,47.865 h0.8 r90
C7: Mechanical 21 "R15" at 117.659,15.465 h0.8 r90
C8: Mechanical 21 "R15" at 93.659,15.465 h0.8 r90
D1: Top Overlay "R15" at 79.07,20.24 h0.8 r270
D2: Top Overlay "R15" at 80.32,58.815 h0.8 r180
D3: Top Overlay "R15" at 63.07,20.24 h0.8 r270
D4: Top Overlay "R15" at 55.07,20.232 h0.8 r270
D5: Top Overlay "R15" at 71.07,20.24 h0.8 r270
IC1: Mechanical 21 "R15" at 78.409,17.54 h0.8 r90
IC2: Mechanical 21 "R15" at 84.659,17.465 h0.8 r90
IC3: Mechanical 21 "R15" at 83.659,27.465 h0.8 r90
L2: Mechanical 21 "R15" at 85.259,47.365 h0.8 r90
L3: Mechanical 21 "R15" at 84.259,44.365 h0.8 r90
R1: Mechanical 21 "R15" at 87.995,18.679 h0.8 r180
R2: Mechanical 21 "R15" at 84.095,4.679 h0.8 r180
R3: Mechanical 21 "R15" at 65.045,3.501 h0.8
R4: Mechanical 21 "R15" at 78.659,49.79 h0.8 r90
R5: Mechanical 21 "R15" at 72.095,18.579 h0.8 r180
R6: Mechanical 21 "R15" at 57.145,3.601 h0.8
R7: Mechanical 21 "R15" at 51.145,17.334 h0.8
R8: Mechanical 21 "R15" at 80.045,18.579 h0.8 r180
R9: Mechanical 21 "R15" at 54.945,61.721 h0.8
R11: Mechanical 21 "R15" at 78.739,6.965 h0.8 r90
X1: Bottom Overlay "R15" at 20.2,21.16 h0.8 r180; Bottom Overlay "RX1" at 47.63,21.16 h0.8 r180
X2: Bottom Overlay "R15" at 48.38,42.34 h0.8; Bottom Overlay "R15" at 20.32,43.18 h0.8
X3: Bottom Overlay "R15" at 49.96,25.28 h0.8 r270; Bottom Overlay "R15" at 49.96,37.72 h0.8 r270
X4: Bottom Overlay "R15" at 22.02,25.28 h0.8 r270; Bottom Overlay "R15" at 22.02,37.72 h0.8 r270
X5: Bottom Overlay "R15" at 24.56,25.28 h0.8 r270; Bottom Overlay "R15" at 24.56,37.72 h0.8 r270
X6: Mechanical 21 "R15" at 80.989,43.907 h0.8
X7: Mechanical 21 "R15" at 78.449,43.907 h0.8
X8: Mechanical 21 "R15" at 94.495,34.579 h0.8 r180; Mechanical 15 "R15" at 90.182,35.06 h0.8 r270
X9: Mechanical 21 "R15" at 94.82,24.279 h0.8 r180; Mechanical 15 "R15" at 90.507,24.76 h0.8 r270
X10: Mechanical 21 "R15" at 39.345,34.921 h0.8